# Altium PCB SensorBoard.PcbDoc
Units mil, origin at the board's own origin, x right, y up, seen from the top; angles counter-clockwise.
Board outline 1344.06 x 950.03 mil, 2 copper layers (Top1, Bottom2), stack 42.17 mil thick; 68 components, 49 nets, 268 pads, 209 vias.
Unrouted connection lines stored in the file: 36.
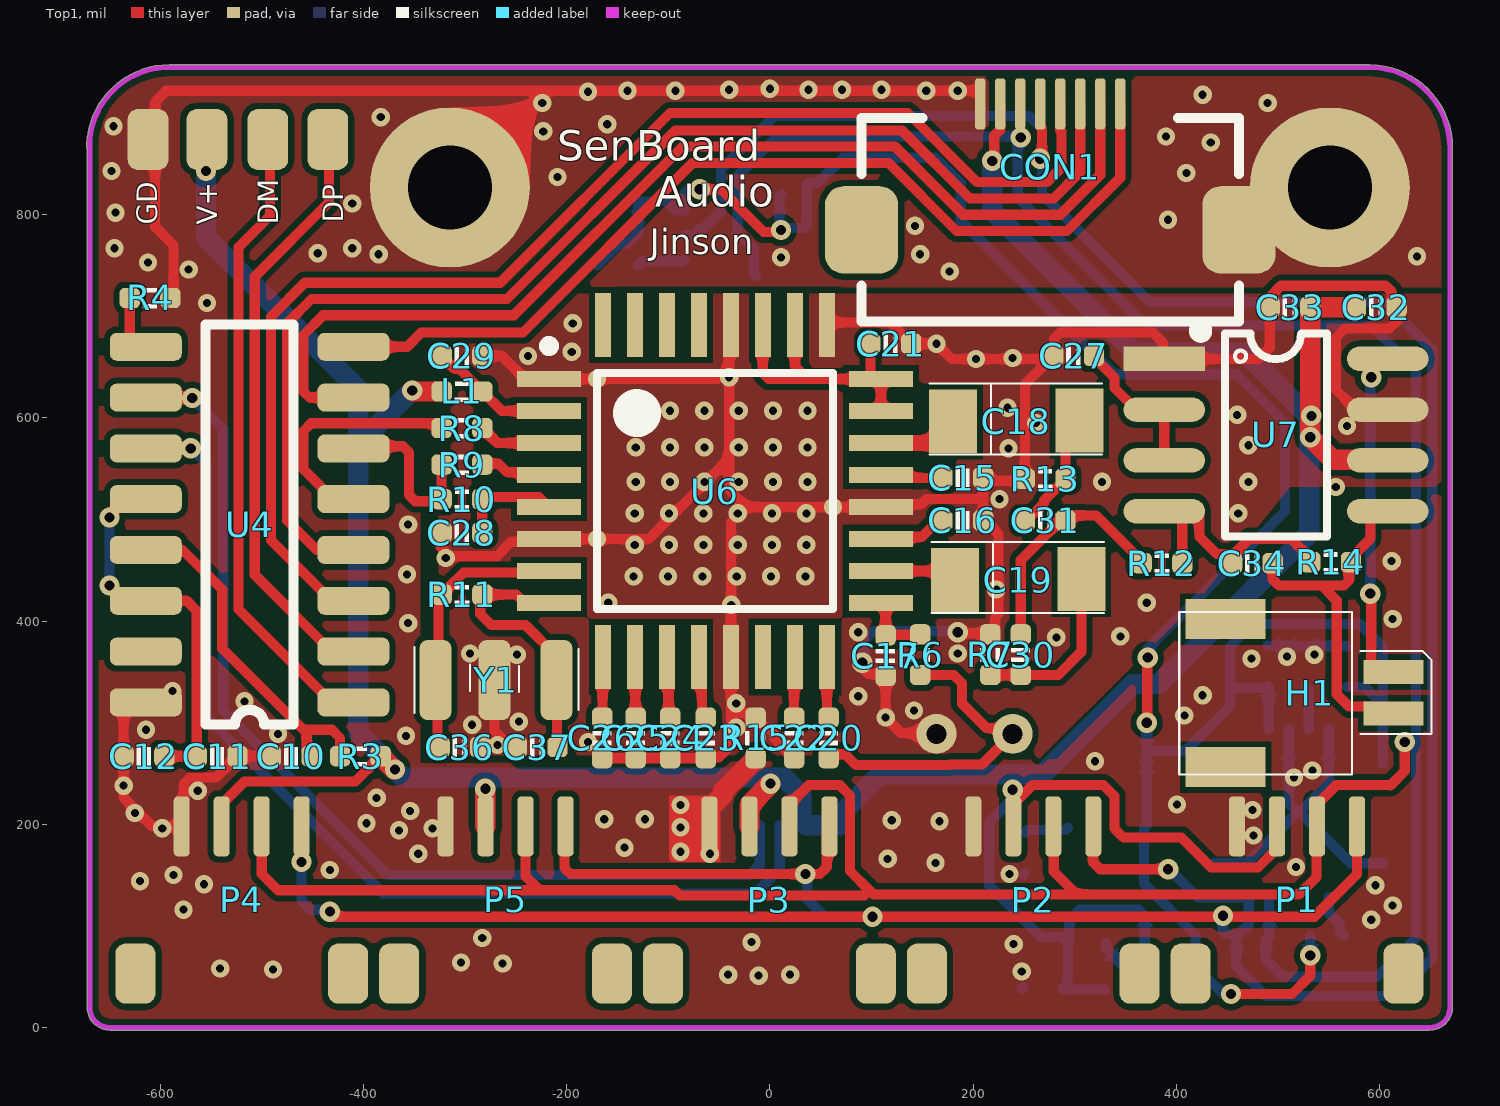
[diagram p0: Top1 view]
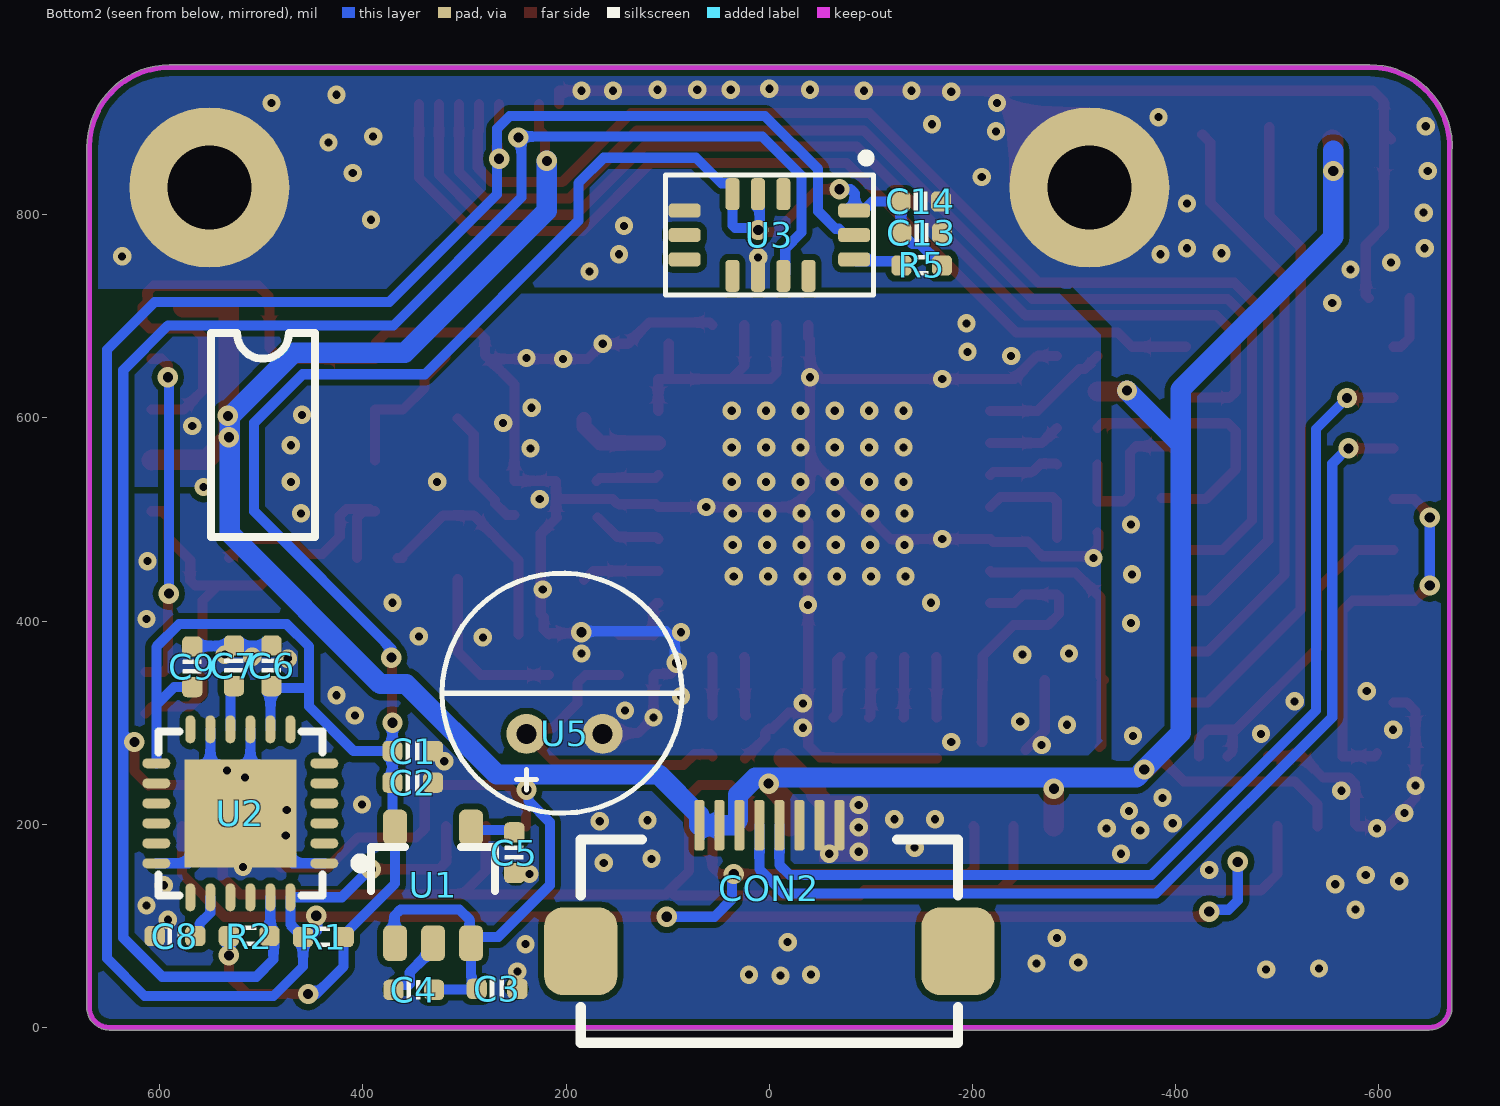
[diagram p1: Bottom2 view, seen from below]
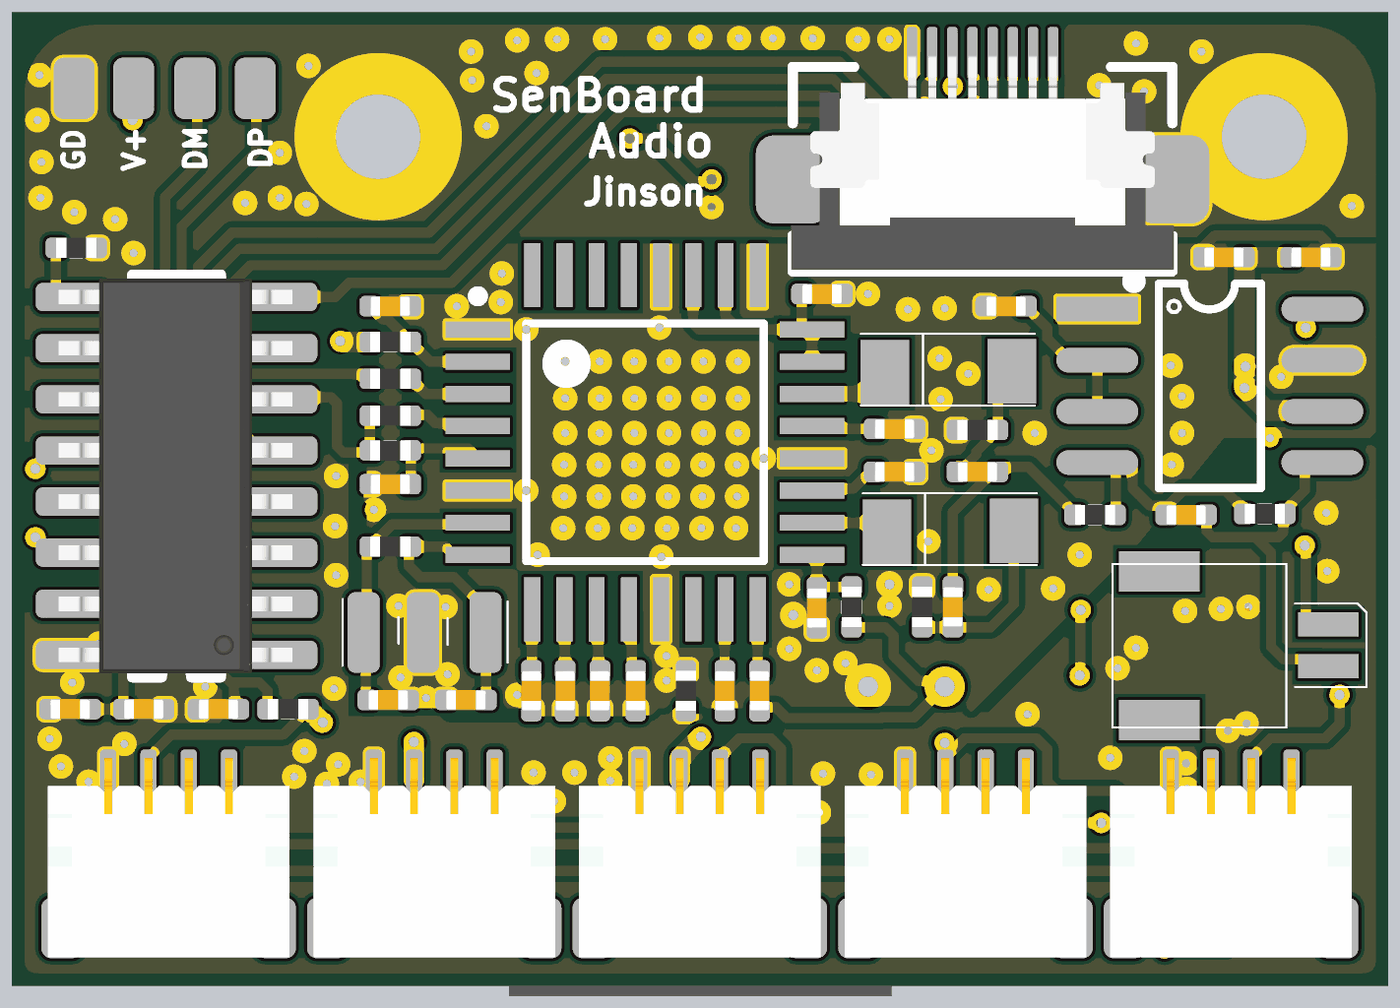
[diagram p2: 3D render of the assembled board from above, using the file's embedded part models]
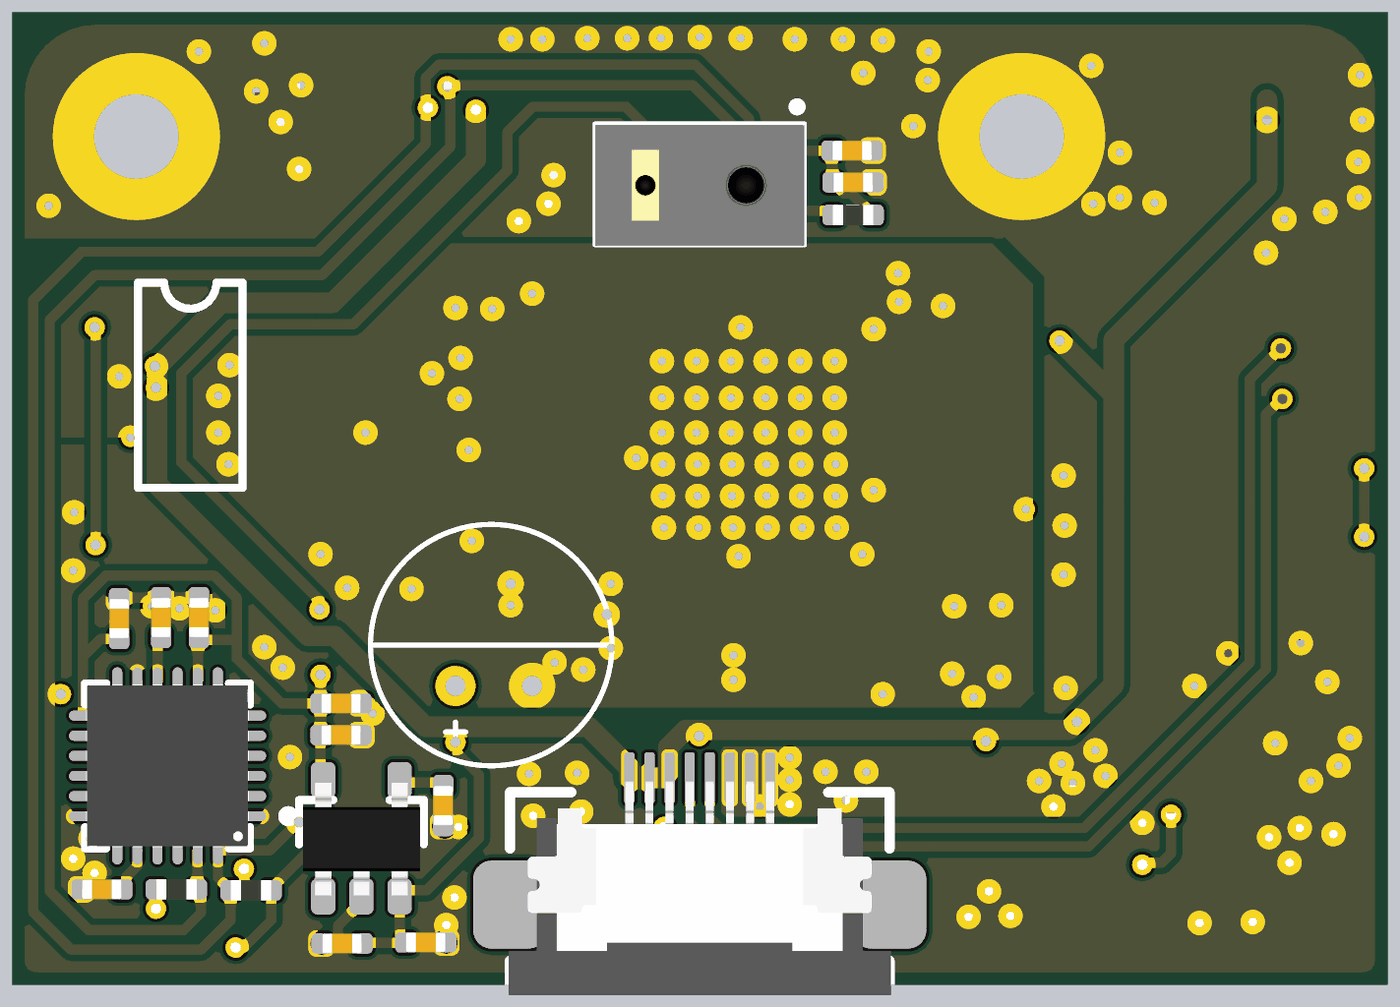
[diagram p3: 3D render of the assembled board from below, using the file's embedded part models]

## Layer stack, top to bottom
Top Solder: solder mask 0.4, Solder Resist, Dk 3.5
Top1: signal copper 1.4
Dielectric 1: prepreg 39.3701, PP-006, Dk 4.1
Bottom2: signal copper 1.4
Bottom Solder: solder mask 0.4, Solder Resist, Dk 3.5

## Board outline
-671.81,19.68 -671.81,864.83 cw(c-669.74,866.26) -672.26,866.26 cw(c-591,866.26) -671.81,874.79 -671.81,876 cw(c-669.29,876) -671.52,877.17 cw(c-591,866.26) -591,947.52 cw(c-591,945) -590.24,947.4 590.55,947.4 cw(c590.55,866.14) 671.81,866.14 671.81,19.68 ccw(c669.29,19.68) 671.81,19.69 671.81,19.68 cw(c649.61,19.68) 649.61,-2.52 cw(c649.61,0) 649.58,-2.51 -649.61,-2.51 -649.61,-2.52 ccw(c-649.61,0) -649.58,-2.51 -649.61,-2.52 cw(c-649.61,19.68)

## Design rules (kind name [scope] priority, off if disabled: settings)
Clearance Clearance_Logo [InNetClass('Logo')] p1: gap=8 ignorepadtopadclearanceinfootprint=FALSE
Clearance [All] p2: gap=6 ignorepadtopadclearanceinfootprint=FALSE
ComponentClearance [All] p1: gap=0 collisioncheckmode=3 verticalgap=0 showdistances=FALSE
DiffPairsRouting [All] p1: maxlimit=9 minlimit=9 mostfreqgap=9 toplayer_minwidth=15 toplayer_maxwidth=15 toplayer_prefwidth=15 bottomlayer_minwidth=15 bottomlayer_maxwidth=15 bottomlayer_prefwidth=15 maxuncoupledlength=500
FanoutControl Fanout_BGA [All] p1: bgadir=Out bgaviamode=Centered fanoutstyle=Auto fanoutdirection=Alternating viagrid=1 // Fanout_BGA (Default Rule)
HoleSize [All] p1: absolutevalues=TRUE maxlimit=10000 minlimit=8 maxpercent=80.000 minpercent=20.000
MinimumSolderMaskSliver [All] p1 off: minsoldermaskwidth=2
PlaneClearance [All] p1: clearance=6
PlaneConnect [All] p1: planeconnectstyle=Direct reliefexpansion=20 reliefentries=4 reliefconductorwidth=10 reliefairgap=10
PolygonConnect [All] p1: connectstyle=Direct reliefconductorwidth=10 reliefentries=4 polygonreliefangle="90 Angle" airgapwidth=10
RoutingVias [All] p1: holewidth=8 width=16 viastyle="Through Hole" minholewidth=6 minwidth=12 maxholewidth=28 maxwidth=50
SilkToSilkClearance [All] p1: silktosilkclearance=0
SilkToSolderMaskClearance [IsPad] p1: minsilkscreentomaskgap=0 clearancetoexposedcopper=TRUE
SolderMaskExpansion [All] p1: expansion=3
Width Logo [InNetClass('Logo')] p1: maxlimit=100 minlimit=0.1 preferedwidth=10
Width GND [(InNet('AGND') OR InNet('GND'))] p2: maxlimit=50 minlimit=4 preferedwidth=10
Width VCC [(InNet('VDD_SYS_3.3V') OR InNet('VDD_AV_3.3V') OR InNet('VDD_5V') OR InNet('VDD1V2-SYS') OR InNet('VDD1V1-EPHY') OR InNet('VDD-CPUX') OR InNet('VDD-CPUS') OR InNet('VDD-CPUFB') OR InNet('VCC-DRAM'))] p3: maxlimit=50 minlimit=4 preferedwidth=10
Width [All] p4: maxlimit=10000 minlimit=4 preferedwidth=4
21 further rules are at their usual default settings.

## Components (designator, comment, footprint, x,y, rotation, side; value= is the part's Value field where it differs from the comment)
C1 "0.1uF" CAP_0402 351,272 r0 bottom value=0.1u
C2 "10uF" CAP_0402 351,241 r0 bottom value=0.1u
C3 "10uF" CAP_0402 268,38 r0 bottom value=0.1u
C4 "0.1uF" CAP_0402 350,37 r180 bottom value=0.1u
C5 "10nF" CAP_0402 251,172 r90 bottom value=0.1u
C6 "10nF" CAP_0402 490,356 r90 bottom value=0.1u
C7 "0.1uF" CAP_0402 527,356 r90 bottom value=0.1u
C8 "2.2nF" CAP_0402 585,90 r180 bottom value=0.1u
C9 "0.1uF" CAP_0402 568,355 r270 bottom value=0.1u
C10 "10uF" CAP_0402 -471,267 r0 top value=0.1u
C11 "10uF" CAP_0402 -544,267 r0 top value=0.1u
C12 "0.1uF" CAP_0402 -616,267 r180 top value=0.1u
C13 "10uF" CAP_0402 -150,782 r180 bottom value=0.1u
C14 "0.1uF" CAP_0402 -149,813 r180 bottom value=0.1u
C15 "1uF" CAP_0402 190,541 r0 top value=0.1u
C16 "1uF" CAP_0402 190,499 r0 top value=0.1u
C17 "3.3uF" CAP_0402 114,366 r270 top value=0.1u
C18 "100UF" 3225_C 232,594 r0 top value=0.1u
C19 "100UF" 3225_C 234,438 r0 top value=0.1u
C20 "0.22uF" CAP_0402 58,285 r270 top value=0.1u
C21 "1uF" CAP_0402 119,673 r0 top value=0.1u
C22 "1uF" CAP_0402 24,285 r270 top value=0.1u
C23 "0.1uF" CAP_0402 -63,285 r90 top value=0.1u
C24 "3.3UF" CAP_0402 -98,285 r90 top value=0.1u
C25 "100PF" CAP_0402 -132,285 r90 top value=0.1u
C26 "100PF" CAP_0402 -165,285 r90 top value=0.1u
C27 "105" CAP_0402 299,661 r180 top value=0.1u
C28 "1uF" CAP_0402 -303,487 r0 top value=0.1u
C29 "1uF" CAP_0402 -303,661 r0 top value=0.1u
C30 "105" CAP_0402 247,367 r270 top value=0.1u
C31 "105" CAP_0402 271,499 r180 top value=0.1u
C32 "106" CAP_0402 597,709 r0 top value=0.1u
C33 "104" CAP_0402 512,709 r180 top value=0.1u
C34 "100P" CAP_0402 475,457 r180 top value=0.1u
C36 "12pf" CAP_0402 -305,276 r0 top value=0.1u
C37 "12pf" CAP_0402 -229,276 r180 top value=0.1u
CON1 "FFC_0.5_8" FFC_0.5_8 276,820 r0 top
CON2 "FFC_0.5_8" FFC_0.5_8 0,110 r180 bottom locked
H1 "SPEAKER" header2p_1.0 493,329 r270 top
L1 "1uH" RES_0402 -303,626 r180 top value=22R
P1 "SH1.0-4P" SH1.0-4P 518.98,198 r0 top locked
P2 "SH1.0-4P" SH1.0-4P 259.29,198 r0 top locked
P3 "SH1.0-4P" SH1.0-4P -0.39,198 r0 top locked
P4 "SH1.0-4P" SH1.0-4P -519.76,198 r0 top locked
P5 "SH1.0-4P" SH1.0-4P -260.08,198 r0 top locked
R1 "10K" RES_0402 439,89 r180 bottom value=22R
R2 "10K" RES_0402 512,90 r0 bottom value=22R
R3 "4.7R" RES_0402 -403,267 r180 top value=22R
R4 "100K" RES_0402 -610,718 r180 top value=22R
R5 "10K" RES_0402 -150,750 r180 bottom value=22R
R6 "1K" RES_0402 148,367 r270 top value=22R
R7 "1K" RES_0402 217,367 r270 top value=22R
R8 "22R" RES_0402 -303,590 r180 top
R9 "22R" RES_0402 -303,554 r180 top
R10 "1.5K" RES_0402 -303,520 r180 top value=22R
R11 "1M" RES_0402 -303,426 r0 top value=22R
R12 "50K" RES_0402 386,457 r0 top value=22R
R13 "1K" RES_0402 271,540 r0 top value=22R
R14 "50K" RES_0402 552,458 r0 top value=22R
R15 "0R" RES_0402 -14,285 r90 top value=22R
U1 "LP2992 3V3" SOT23-5 331,142 r90 bottom
U2 "MPU6050" QFN-24 520.68,210.79 r0 bottom
U3 "PAJ7620U2" PAJ7620U2 0,780 r270 bottom locked
U4 "HS8836A" SO-16N -517,490 r180 top
U5 "MIC" MIC6*2.2 204,329 r90 bottom
U6 "PCM2912A" PCM2912 -54,528 r0 top
U7 "SC8002B" SOP-8 498,583 r0 top
Y1 "6MHz" "cystal-3P -4520" -270,341 r180 top

## Footprints (in the part's own frame and the unit in brackets; to place one, negate y for a bottom-side part, rotate by r counter-clockwise, add the part's x,y. Pads: shape width x height; smd on the part's side, far side on the other; paste and mask are expansions set on the pad)
3225_C [mm]
  rect 1.2x1.6 smd: 1(-1.309,0.062) 2(1.845,0.085)
  silkscreen extent -1.91,-0.76 2.41,1.02
CAP_0402 [mil]
  rrect50% 20x20 smd: 1(-20,0) 2(20,0)
  silkscreen extent -6,-9 6,9, body extent -20,-10 20,10, height 20
"cystal-3P -4520" [mm]
  rrect50% 0.8x2 smd: 1(-1.525,-0.025) 2(0.026,-0.024) 3(1.5,-0.025)
  silkscreen extent -2.07,-0.85 2.02,0.8
FFC_0.5_8 [mil]
  rrect50% 72x86 smd: 0(-185.63,-35) 0(185.63,-35)
  rrect50% 10x50 smd: 1(-68.9,89) 2(-49.21,89) 3(-29.53,89) 4(-9.84,89) 5(9.84,89) 6(29.53,89) 7(49.21,89) 8(68.9,89)
  silkscreen extent -186,-125 186,75, body extent -187,-124 187,87, height 82
header2p_1.0 [mm]
  rect 1x2 smd: 0(-1.85,-1.125) 0(1.85,-1.125)
  rect 0.6x1.5 smd: 1(-0.532,3.075) 2(0.509,3.075)
  silkscreen extent -2.03,-2.29 2.03,4.03
MIC6*2.2 [mm]
  round 1 hole 0.5: 1(-1.016,0.889) 2(-1.016,-1.016)
  silkscreen extent -3,-3 3,3
PAJ7620U2 [mm]
  rrect50% 0.35x0.8 smd: 1(-0.61,2.12) 2(0,2.12) 3(0.61,2.12) 8(0.61,-2.12) 9(0,-2.12) 10(-0.61,-2.12)
  rrect50% 0.8x0.35 smd: 4(1.02,0.983) 5(1.02,0.348) 6(1.02,-0.287) 7(1.02,-0.922) 11(-1.02,-0.922) 12(-1.02,-0.287) 13(-1.02,0.348)
  silkscreen extent -1.95,-2.6 1.5,2.6, body extent -1.48,-2.6 1.52,2.6, height 1.9
PCM2912 [mm]
  rect 1.6x0.4 smd: 1(-4.15,2.8) 2(-4.15,2) 3(-4.15,1.2) 4(-4.15,0.4) 5(-4.15,-0.4) 6(-4.15,-1.2) 7(-4.15,-2) 8(-4.15,-2.8) 17(4.15,-2.8) 18(4.15,-2) 19(4.15,-1.2) 20(4.15,-0.4) 21(4.15,0.4) 22(4.15,1.2) 23(4.15,2) 24(4.15,2.8)
  rect 0.4x1.6 smd: 9(-2.8,-4.15) 10(-2,-4.15) 11(-1.2,-4.15) 12(-0.4,-4.15) 13(0.4,-4.15) 14(1.2,-4.15) 15(2,-4.15) 16(2.8,-4.15) 25(2.8,4.15) 26(2,4.15) 27(1.2,4.15) 28(0.4,4.15) 29(-0.4,4.15) 30(-1.2,4.15) 31(-2,4.15) 32(-2.8,4.15)
  silkscreen extent -4.27,-2.95 2.95,3.75, body extent -3.5,-3.5 3.5,3.5, height 1.2
QFN-24 [mm] "QFN, 24-Leads, Body 4.1x4.1mm (max), Pitch 0.50mm, IPC Low Density"
  oval 0.7x0.25 smd: 1(-2.1,1.25) 2(-2.1,0.75) 3(-2.1,0.25) 4(-2.1,-0.25) 5(-2.1,-0.75) 6(-2.1,-1.25) 13(2.1,-1.25) 14(2.1,-0.75) 15(2.1,-0.25) 16(2.1,0.25) 17(2.1,0.75) 18(2.1,1.25)
  oval 0.25x0.7 smd: 7(-1.25,-2.1) 8(-0.75,-2.1) 9(-0.25,-2.1) 10(0.25,-2.1) 11(0.75,-2.1) 12(1.25,-2.1) 19(1.25,2.1) 20(0.75,2.1) 21(0.25,2.1) 22(-0.25,2.1) 23(-0.75,2.1) 24(-1.25,2.1)
  rect 2.8x2.7 smd: ""(0,0)
  silkscreen extent -3.12,-2.05 2.05,2.05, body extent -2.02,-2.02 2.02,2.02, height 0.95
RES_0402 [mil]
  rrect50% 20x20 smd: 1(-20,0) 2(20,0)
  silkscreen extent -7,-10 7,10, body extent -20,-10 20,10, height 14
SH1.0-4P [mm]
  rrect50% 0.4x1.5 smd: 1(-1.5,0) 2(-0.5,0) 3(0.5,0) 4(1.5,0)
  rrect50% 1x1.5 smd: SH1(-2.659,-3.683) SH2(2.659,-3.683)
  body extent -3,-4.42 3,0.54, height 3.14
SO-16N [mm]
  rrect50% 1.8x0.7 smd: 1(-2.723,4.318) 2(-2.723,3.048) 3(-2.723,1.778) 4(-2.723,0.508) 5(-2.723,-0.762) 6(-2.723,-2.032) 7(-2.723,-3.302) 8(-2.723,-4.572) 9(2.469,-4.572) 10(2.469,-3.302) 11(2.469,-2.032) 12(2.469,-0.762) 13(2.469,0.508) 14(2.469,1.778) 15(2.469,3.048) 16(2.469,4.318)
  silkscreen extent -1.23,-5.13 0.97,4.87, body extent -3,-5.03 2.8,4.77, height 1.75
SOP-8 [mil]
  rect 80x24 smd: 1(-109.81,75.17)
  oval 80x24 smd: 2(-109.81,25.17) 3(-109.81,-24.83) 4(-109.81,-74.83) 5(110.19,-74.83) 6(110.19,-24.83) 7(110.19,25.17) 8(110.19,75.17)
  silkscreen extent -80,-100 50,108
SOT23-5 [mm] "SOT23, 3-Leads, Body 3.1x3.0mm (max), Pitch 0.95mm, IPC Medium Density"
  rrect50% 0.889x0.6 smd: 1(-1.5,0.95) 2(-1.5,0) 3(-1.5,-0.95) 4(1.396,-0.95) 5(1.396,0.95)
  silkscreen extent -0.2,-1.55 0.9,1.55, body extent -1.48,-1.45 1.32,1.45, height 1.2

## Part data
C1 C2 C3 C4 C5 C6 C7 C8 C9 C10 C11 C12 C13 C14 C15 C16 C17 C18 C19 C20 C21 C22 C23 C24 C25 C26 C27 C28 C29 C30 C31 C32 C33 C34 C36 C37: library part 电容-0402, "Capacitor"
CON1 CON2: "FFC"
H1: library part HEADER-2P
L1 R1 R2 R3 R4 R5 R6 R7 R8 R9 R10 R11 R12 R13 R14 R15: library part 电阻-0402, "Resistor"
U1: library part LP2992, "LDO"
U2: "六轴传感器"
U3: "module sensorPAJ7620U2 : 54/TRAY, 5400/BOX, 32400/CARTON", Package=None, Availability="Not in stock", Check_prices=https://www.snapeda.com/parts/PAJ7620U2/PixArt/view-part/?ref=eda, MF=Pixart, MP=PAJ7620U2, Price=None, SnapEDA_Link=https://www.snapeda.com/parts/PAJ7620U2/PixArt/view-part/?ref=snap
U4: "USB2.0 HUB"
Y1: library part 晶振-3Pin, "村田贴片"

## Free pads (board coordinates)
  rrect50% 40x60 smd: ""(-612,874) ""(-554,874) ""(-494,874) ""(-435,874)
  round 157.48 hole 82.68: ""(-314.96,826.77) ""(551.18,826.77)

## Via types
v1: diameter 18, hole 8, Top1 to Bottom2, 177 vias
v2: diameter 20, hole 10, Top1 to Bottom2, 32 vias

## Nets (pads, with @x,y where several pads share a name; then routed paths per layer and width w, separated by ;. In a path a pad name is that pad's centre, name@x,y a point inside that pad or via, vN(x,y) a via of type N, cw(c..) or ccw(c..) an arc to the next point about the centre after c; other vN are vias at no path point)
GND: C1.1 C2.1 C3.1 C4.1 C5.1 C6.2 C7.2 C8.1 C9.1 C10.1 C11.2 C12.2 C13.2 C14.2 CON1.0@461.63,785 CON1.1 CON2.6 CON2.7 CON2.8 P1.1 P2.1 P3.1 P4.1 P5.1 pad.@551.18,826.77 pad.@-314.96,826.77 pad.@-612,874 R4.1 R15.1 U1.2 U2. U2.1 U2.9 U2.11 U2.18 U3.6 U3.10 U4.16 | length 2119.5
  Top1 w10: U4.16 -627.36,320 -636,311.36 C12.2 -636,226 -608,198 P4.1 -576.47,200.35 -576.47,240.14 -570.61,246 -545,246 C11.2 C10.1 ; pad.@-612,874 pad.@-605,881 ; R4.1 -587,721 -587,770 -605,788 pad.@-605,881 ; pad.@-314.96,826.77 -219.73,922 ; CON1.1 207.1,922 -219.73,922 ; pad.@-605,881 -605,911 -594,922 -219.73,922
  Top1 w20: P3.1 -59.45,215.4 -46,228.85 -46,233 R15.1
  Bottom2 w10: C3.1 C3.1@249.5,39.5 ; C5.1@249.5,150.5 C5.1 ; U1.2 331,77.26 354,54.26 354,42.86 354.86,42 365,42 C4.1 ; U2.1 469.5,161.57 518.71,210.79 U2. ; C6.2 490.5,375.5 567.5,375.5 C9.1 ; U2.9 510.83,220.63 U2. ; U2.11 550.2,240.31 U2. ; U2.18 571.86,161.57 522.65,210.79 U2.
  other v1: -11,51 -41,52 20,52 248,55 -489,57 -541,58 -263,63 -304,64 240,82 -18,84 -283,88 592,106 -577,116 613,120 596,140 -557,141 -620,144 -587,150 236,151 -433,155 518,158 163,162 116,166 -346,171 -59,171 -88,173 -143,177 476,189 -365,194 -598,196 -332,196 -88,197 -397,201 167,203 120,204 -163,205 -123,205 -625,211 -354,213 475,214 -88,219 400.87,219.42 -387,226 -563,233 -636,238 516,246 534,253 320,262 -358,287 -484,289 -614,293 408,307 -517,321 426,327 -588,331 474,363 509,365 536,367 -356,398 613,402 -357,446 612,459 -356,495 -554,713 177,744 -572,746 -612,753 11,758 637,759 -385,761 148,761 -445,762 -645,767 -411,767 143,789 392,795 -644,802 -411,811 -209,837 410,841 -648,843 434,871 390,877 -223,882 -646,887 -160,889 -383,896 -224,910 490,910 426,918 -179,921 -140,922 -93,922 154,922 185,922 -40,923 38,923 71,923 110,923 0,924
GND_AUDIO_1: C15.2 C16.2 C17.2 C21.2 C22.2 C23.1 C24.1 C25.1 C26.1 C27.2 C28.1 C29.2 C32.2 C33.2 C36.2 C37.2 R7.1 R13.1 R15.2 U5.2 U6.1 U6.6 U6.13 U6.20 U6.25 U6.28 U7.1 U7.7 Y1.2 | length 3054.4
  Top1 w10: C28.1 -324,486 -324,473 -314.82,463.82 -268.56,463.82 -262,470.37 -262,471 -255.12,477.88 -220.26,477.88 U6.6 v1(-170.14,480.76) -119.24,480.76 -40,560 ; C29.2 -263.77,661 -241.01,638.24 U6.1 v1(-170.14,638.24) -51.76,638.24 -40,650 ; Y1.2 -271,292 C37.2@-252,273 ; C26.1 C25.1 C24.1 C23.1 -62,266 -50,266 -38.25,277.75 v1@-38.25,314 ; U6.28 -38.25,679 -40,677.25 -40,650 ; C22.2 4,285 4,290 0,294 -3,294 R15.2 -19,310 -34.25,310 v1@-38.25,314 ; U6.25 58.85,694 118,694 C21.2 v1(164,673) 179,658 v1(203,658) C27.2@276,658 ; v2(91,359) 91,353.86 96.86,348 112,348 C17.2 v1(114,305) 129.31,289.69 163.31,289.69 U5.2 ; v2(185,389) 186,388 216,388 R7.1 222,392 222,404 225,407 225,486 C16.2@209,502 ; C16.2@210,502 210,525 ; U7.7 576.41,608.17 557.19,627.38 557.19,679.19 566,688 610,688 617,695 C32.2 612,714 612,724.14 606.14,730 503,730 493,720 493,710 C33.2 492,669 481,658 388.37,658 U7.1 387,659.37 387,674 377,684 285.86,684 280,678.14 280,662 C27.2 C27.2@276,658 ; -40,560 v1(-40,640) -40,650 ; -40,560 -40,529 -23.25,512.25 ; v1@-38.25,314 U6.13 -38.25,497.25 -23.25,512.25 ; -23.25,512.25 v1(62.14,512.25) U6.20 112.26,515.13 149.13,515.13 154,520 205,520 210,525 ; 210,525 210,538 251,538 R13.1 251,633 C27.2@276,658
  Bottom2 w10: v2(91,359) 92.91,360.91 92.91,380.91 102,390 184,390 v2(185,389)
  other v1: -268,278 -179,281 -33,295 -293,298 -247,301 142,312 -33,319 87,326 -249,367 -295,368 185,368 282,384 345,385 87,389 -38,416 -159,418 371,418 223,431 -134,444 -100.2,444 -66.4,444 -32.6,444 1.2,444 35,444 -319,462 -133,475 -99.2,475 -65.4,475 -31.6,475 2.2,475 36,475 -133,506 -99.2,506 -65.4,506 -31.6,506 2.2,506 36,506 461,506 226,520 557,532 -132,537 -98.2,537 -64.4,537 -30.6,537 3.2,537 37,537 327,537 471,537 235,570 -132,571 -98.2,571 -64.4,571 -30.6,571 3.2,571 37,571 471,573 568,592 262,595 460,603 -132,607 -98.2,607 -64.4,607 -30.6,607 3.2,607 37,607 234,610 239,659 -238,661 -195,665 -194,693
I2C_SCL_1: CON1.3 P1.3 P2.3 P3.3 P4.3 P5.3 R2.1 U2.23 U3.5 | length 3375.1
  Top1 w10: P4.3 -500.08,151.08 -484,135 -226.5,135 ; P5.3 -240.39,148.89 -226.5,135 ; P3.3 19.29,219.65 38.17,238.53 68.79,238.53 79,228.31 79,154 98,135 ; P2.3 279.53,197.45 279.53,153.47 298.22,134.78 302,131 ; v2(625,281) 625,252.47 611,238.47 611,238.53 557.54,238.53 538.66,219.65 P1.3 538,197.34 538,148 521,131 302,131 ; -226.5,135 -93.9,135 -88.9,130 93,130 98,135 ; 98,135 102,131 302,131
  Bottom2 w10: U3.5 -15.59,741.73 -15.59,766.59 -31.59,782.59 -31.59,838.44 6.88,876.91 v2@244.09,876.91 ; v2(247,876) 245,876 v2@244.09,876.91 ; U2.23 491.23,128.03 491.23,90.77 R2.1 488,86 488,67 505,50 597.63,50 636,88.37 636,289 ; v2(625,281) 628,281 636,289 ; v2@244.09,876.91 244.09,816.91 370,691 592,691 636,647 636,289
I2C_SDA_1: CON1.4 P1.4 P2.4 P3.4 P4.4 P5.4 R1.1 U2.24 U3.2 | length 3714.9
  Top1 w10: v2(-433,114) -428,109 v2(101,109) 536,109 578.03,151.03 P1.4 ; P5.4 -202,197.02 -202,156.86 -196.14,151 v2(35,151) 49.14,151 56,157.86 56,195.34 P3.4 ; v2(266,855) 268,857 268,884.7 266,886.7 266,908.84 CON1.4 ; P2.4 318,197.65 318,163 325.22,155.78 v2(392.02,155.78)
  Bottom2 w10: v2(-461,163) -461,125 -451.91,115.91 -434.91,115.91 v2(-433,114) ; U3.2 -74.61,780 -68.48,786.13 -65.18,786.13 -48,803.3 -48,844.66 4.34,897 255.7,897 268,884.7 268,820 374,714 605,714 652,667 652,68 615,31 488,31 459,60 R1.1 ; v2(35,151) 36.91,149.09 36.91,126.09 54,109 v2(101,109) ; v2(392.02,155.78) 393.22,155.78 420.89,128.11 U2.24 471.39,128.03 471.39,101.39 R1.1 ; v2(446,110) 445.5,109.5 445.5,95 448.5,92 456,92 R1.1
NetC5_2: C5.2 U1.4 | length 44.6
  Bottom2 w10: C5.2 253.47,194.47 291.13,194.47 U1.4
NetC7_1: C7.1 U2.10 | length 44
  Bottom2 w10: C7.1 530.44,332.56 530.44,293.54 U2.10
NetC8_2: C8.2 U2.20 | length 44.2
  Bottom2 w10: U2.20 550.28,128.03 550.28,112.72 561,102 561,94 C8.2
NetC10_2: C10.2 R3.2 U4.13 | length 349.1
  Top1 w10: U4.13 -578,470 -539,431 -539,373 -459,293 ; C10.2 -456,272 -456,290 -459,293 ; R3.2 -423,285 -431,293 -459,293
NetC11_1: C11.1 C12.1 U4.12 U4.14 | length 409.2
  Top1 w10: v2(-650,435) -649.84,435 -634.84,420 U4.14 -574,420 -564,410 C11.1 C12.1@-595,267 ; v2(-650,502) -648.09,503.91 -648.09,506.75 -634.84,520 U4.12 ; U4.14@-633.86,421 U4.14@-612.2,421 ; C12.1@-598,270 C12.1@-595,267 ; C12.1 C12.1@-595,267
  Bottom2 w10: v2(-650,435) v2(-650,502)
NetC15_1: C15.1 U6.21 | length 63
  Top1 w10: U6.21 112.26,540.87 167.13,540.87 C15.1@170,538
NetC16_1: C16.1 U6.19 | length 68.4
  Top1 w10: U6.19 111.49,482.86 149.86,482.86 C16.1@169,502
NetC17_1: C17.1 R6.1 U6.17 | length 69.1
  Top1 w10: U6.17 111.13,417.76 114,414.89 C17.1 114.5,386.5 147.5,386.5 R6.1
NetC18_1: C18.1 U6.22 | length 86.8
  Top1 w15: U6.22 166.35,575.24 182.47,591.37 C18.1@182.47,598.45
NetC19_1: C19.1 U6.18 | length 76.7
  Top1 w10: U6.18 173.66,449.26 C19.1
NetC20_1: C20.1 U6.16 | length 57.7
  Top1 w10: C20.1@56,307 56.12,307.12 56.12,364.5 U6.16
NetC20_2: C20.2 R6.2 U5.1 | length 327.7
  Top1 w10: C20.2@56,267 58,269 74,269 84.69,258.31 176.71,258.31 177.4,259 209,259 U5.1 233.38,294.62 213.38,294.62 189,319 189,339 181,347 R6.2
NetC21_1: C21.1 U6.23 U6.24 U6.26 U6.27 | length 292.1
  Top1 w10: U6.27 -7,691.14 -7,644.09 -1.14,638.24 37.5,638.24 ; U6.26 24.74,651 37.5,638.24 ; C21.1 99,641.11 U6.24@101.87,638.24 ; U6.23 U6.24 U6.24@101.87,638.24 ; 37.5,638.24 U6.24@101.87,638.24
NetC22_1: C22.1 U6.15 | length 58.3
  Top1 w10: C22.1@23,307 23.87,307.87 23.87,363.74 U6.15
NetC23_2: C23.2 U6.12 | length 62.4
  Top1 w10: U6.12 -66.87,361.74 -66.87,308.87 C23.2
NetC24_2: C24.2 U6.11 | length 61
  Top1 w10: U6.11 -99.62,362.99 -99.62,306.62 C24.2
NetC25_2: C25.2 U6.10 | length 59.9
  Top1 w10: U6.10 -132.37,364.24 -132.37,305.37 C25.2
NetC26_2: C26.2 U6.9 | length 59.9
  Top1 w10: C26.2 -164.62,305.38 -164.62,364.23 U6.9
NetC27_1: C27.1 U7.2 U7.3 | length 147.7
  Top1 w10: C27.1 319,659.81 339.27,639.54 339.27,629.44 360.54,608.17 U7.2 U7.3
NetC28_2: C28.2 R10.1 U6.5 | length 107.3
  Top1 w10: C28.2@-283,482 C28.2 -283,518 -279,522 -227.13,522 U6.5
NetC29_1: C29.1 L1.1 U6.2 | length 128.1
  Top1 w10: C29.1 -310,648 -305,648 L1.1 -263.86,606.86 -217.5,606.86 U6.2
NetC30_1: C30.1 C31.1 R12.1 | length 228.8
  Top1 w10: C30.1 247,460 291,504 321,504 361,464 361,462 R12.1@366,462
NetC34_1: C34.1 H1.2 R14.2 U7.5 | length 362.9
  Top1 w10: C34.1 495,441 501,435 543,435 ; U7.5 597.61,508.17 591.14,501.71 591.14,481.14 570,460 570,440 565,435 543,435 ; H1.2 607.25,315.77 570.23,315.77 558,328 558,420 543,435
NetC34_2: C34.2 R12.2 R14.1 U7.4 | length 243.4
  Top1 w10: U7.4 393.19,508.17 399.53,508.17 406,501.71 R12.2@406,462 ; U7.4@393.19,510.17 399.53,510.17 416.36,510.17 422.83,503.71 422.83,483.17 440,466 457,466 472,481 513,481 R14.1@532,462
NetC36_1: C36.1 R11.1 U6.7 Y1.3 | length 269.4
  Top1 w10: C36.1 -327.03,278.03 -327.03,339.96 Y1.3 -326.03,345.01 -326.03,422.97 -301.18,447.82 -218.83,447.82 U6.7
NetC37_1: C37.1 R11.2 U6.8 Y1.1 | length 266.3
  Top1 w10: U6.8 -241.01,417.76 -249.24,426 R11.2 -285,424 -285,407 -274,396 -240.35,396 -209.96,365.61 Y1.1 -209.48,341.5 -209.48,281 C37.1@-209,281
NetH1_1: H1.1 U7.8 | length 344.8
  Top1 w10: v2(591,427) 588.29,427 592,423.29 592,354.31 596.35,349.96 H1.1 ; v2(592,640) 592,651.71 598.47,658.17 U7.8
  Bottom2 w10: v2(591,427) 591,639 v2(592,640)
NetR4_2: R4.2 U4.9 | length 58.7
  Top1 w10: R4.2 -630,678.64 -621.36,670 U4.9
NetR5_1: R5.1 U3.3 | length 49
  Bottom2 w10: R5.1 -125.91,754.09 -85.35,754.09 U3.3
NetR8_1: R8.1 U6.3 | length 71.7
  Top1 w10: R8.1 -268.24,575.24 U6.3
NetR9_1: R9.1 U6.4 | length 70.7
  Top1 w10: R9.1 -282,555 -267,555 -258.62,546.62 -220.26,546.62 U6.4
OUT_L_1: C19.2 C30.2 R7.2 | length 170.7
  Top1 w10: R7.2 C30.2 284,347 306.65,369.65 C19.2
OUT_R_1: C18.2 C31.2 R13.2 | length 122.3
  Top1 w10: C31.2@251,504.5 258.5,504.5 270,516 270,519 R13.2 291,583.71 C18.2 C18.2@306.65,599.36
USB_DM_AUD_1: R8.2 U4.5 | length 261.8
  Top1 w10: U4.5 -429.45,520 -459,549.55 -459,587.14 -451.36,594.78 -327.78,594.78 R8.2 ; U4.5@-407.8,521 U4.5@-386.14,521
USB_DM_CAM_1: pad.@-494,874 U4.1 | length 638.4
  Top1 w10: pad.@-492,886 -492,799 -523,768 -523,411.55 -431.45,320 U4.1
USB_DM_CP_1: CON1.5 U4.3 | length 1284.2
  Top1 w10: U4.3 -431.45,420 -491,479.55 -491,699.66 -457.66,733 -265.25,733 -98.25,900 136,900 204,832 272.7,832 287,846.3 287,881.7 285.84,882.86 CON1.5
USB_DM_HUB_1: CON2.5 U4.10 | length 1004.4
  Top1 w10: U4.10 -613.95,619.75 -568.75,619.75 v2(-568.5,619.5)
  Bottom2 w10: v2(-568.5,619.5) -538,589 -538,312 -376,150 -20,150 -9.84,160.16 CON2.5
USB_DM_ST_1: CON1.7 U4.7 | length 1082.1
  Top1 w10: U4.7 -453.14,620 -459,625.86 -459,681.53 -439.53,701 -252,701 -86,867 123.37,867 190.37,800 285.95,800 325.21,839.26 CON1.7
USB_DP_AUD_1: R9.2 R10.2 U4.6 | length 171.4
  Top1 w10: U4.6@-409.8,573 U4.6@-407.8,571 ; U4.6@-407.8,570 -396.97,570 -394.97,572 -361,572 -355,566 -355,524 -349,518 -323,518 R9.2
USB_DP_CAM_1: pad.@-435,874 U4.2 | length 595.5
  Top1 w10: pad.@-426,879 -434,871 -434,812 -507,739 -507,445.55 -431.45,370 U4.2
USB_DP_CP_1: CON1.6 U4.4 | length 1230.7
  Top1 w10: U4.4@-415,470 -446,470 -475,499 -475,693.03 -451.03,717 -258.63,717 -92.63,883 130,883 197,816 279.33,816 305.53,842.2 CON1.6
USB_DP_HUB_1: CON2.4 U4.11 | length 1004.7
  Top1 w10: U4.11 v2(-570,570)
  Bottom2 w10: v2(-570,570) -569,570 -554,555 -554,305.37 -380.63,132 -14,132 9.84,155.84 CON2.4
USB_DP_ST_1: CON1.8 U4.8 | length 951.8
  Top1 w10: U4.8 -357,670 -343,684 -243,684 -76,851 116.75,851 183.75,784 292.58,784 344.9,836.32 CON1.8
VBUS_IN: C3.2 C4.2 C32.1 C33.1 CON1.2 CON2.1 CON2.2 CON2.3 L1.2 P1.2 P2.2 P3.2 P4.2 P5.2 pad.@-554,874 R3.1 U1.1 U1.3 U7.6 | length 3878.7
  Top1 w10: P4.2 -539.45,219.65 -516.84,242.26 -407.74,242.26 R3.1 ; v2(219,853) 220.91,854.91 220.91,877.62 226.79,883.49 CON1.2 ; P2.2 239.61,219.65 257.95,238 258.53,238.53 328.47,238.53 339.25,227.75 339.25,195.75 348,187 405,187 434.53,157.47 480.42,157.47 499.29,176.35 P1.2
  Top1 w20: v2(-555,843) -555,873 pad.@-554,874 ; R3.1 -370,254 v2(-369,254) ; v2(-352,627) -351,626 L1.2 ; v2(-280,235) -280,198.24 P5.2 ; P3.2 -20,198.08 -20,219.3 v2(0.7,240) ; C32.1 C33.1 v2(532,581) 554.06,558.94 607.43,558.94 U7.6
  Bottom2 w10: 239,249 v2(239,234) 237.09,232.09 237.09,223.09 216,202 216,140 266.79,89.21 287.33,89.21 U1.3 ; C4.2 329.5,37.5 288.5,37.5 C3.2 293,43 293,49.85 293.6,50.44 U1.3 ; U1.1 369,83.54 369,110.14 363.14,116 305,116 295,106 295,84.35 U1.3
  Bottom2 w20: -555,863 v2(-555,843) -555,778 -405,628 -405,574 ; v2(-352,627) -405,574 ; v2(219,853) 219,804 359,664 468,664 531,601 531,486.23 382.77,338 357.3,338 268.3,249 239,249 108.9,249 68.9,209 CON2.1 CON2.2 36,199 30.84,204.16 30.84,229.16 14.01,246 -361,246 v2(-369,254) -405,290 -405,574
  other v2: 533,602
VCC_3V3: C1.2 C2.2 C6.1 C9.2 C13.1 C14.1 R1.2 R2.2 R5.2 U1.5 U2.8 U2.13 U3.1 U3.11 U3.12 | length 2321.3
  Top1 w10: v2(-69,825) -48,825 -6,783 9,783 v2(11,785) ; v2(371,300) 371.5,300.5 371.5,363.5 v2(372,364) ; v2(454,33) 514,33 532,51 v2(532,71)
  Bottom2 w10: R5.2 -159,761 -158.37,761 -148.37,771 -141,771 C13.1 -129.5,782.5 -129.5,812.5 C14.1 -101.31,813 -92.32,804.02 U3.1 -84,804.55 -84,821 -80,825 v2(-69,825) ; 9.41,795.27 9.41,818.27 U3.12 ; v2(11,785) 12.91,786.91 33.8,786.91 36.3,789.41 U3.11 36.3,829.02 38.19,830.91 47.05,830.91 72.14,856 163.14,856 188,831.14 188,794 339,643 459.3,643 507.15,595.15 507.15,508.15 372,373 v2(372,364) ; v2(371,300) C1.2 ; v2(454,33) 446,33 419,60 R1.2 420,90 368.4,141.6 U1.5 371,199.54 C2.2 C1.2 ; U2.8 491.07,293.54 491.07,334.93 C6.1 488,334 453,334 ; v2(532,71) R2.2 ; C9.2 586,335 603.35,317.65 ; U2.13 603.35,317.65 ; C1.2 409,272 453,316 453,334 ; 453,334 453,375 475,397 581,397 603.35,374.65 603.35,317.65
pads on no net: CON1.0@90.37,785 CON2.0 H1.0 P1.SH1 P1.SH2 P2.SH1 P2.SH2 P3.SH1 P3.SH2 P4.SH1 P4.SH2 P5.SH1 P5.SH2 U2.2 U2.3 U2.4 U2.5 U2.6 U2.7 U2.12 U2.14 U2.15 U2.16 U2.17 U2.19 U2.21 U2.22 U3.4 U3.7 U3.8 U3.9 U3.13 U4.15 U6.14 U6.29 U6.30 U6.31 U6.32

## Polygon pours and split planes (outlines as drawn)
GND on Top1 "Top1-GND" (solid, pour order 26): 671,945 -665,945 -669,949 -673,945 -673,-10 653,-10 672,9 665,16 665,532 550,532 282,264 -344,260 -344,689 -298,729 -296,727 673,727
GND_AUDIO_1 on Top1 "Top1-GND_AUDIO_1" (solid, pour order 24): -286,722 668,722 668,553 672,549 655,532 512,532 423,422 265,264 261,268 -314,268 -328,282 -326,284 -326,682
GND on Bottom2 "Bottom2-GND" (solid, pour order 28): 671,945 -665,945 -669,949 -673,945 -673,-10 653,-10 672,9 665,16 665,532 550,532 282,264 -337,264 -337,690 -298,729 -296,727 673,727
GND_AUDIO_1 on Bottom2 "Bottom2-GND_AUDIO_1" (solid, pour order 22): -286,722 668,722 668,553 672,549 655,532 512,532 423,422 265,264 261,268 -314,268 -328,282 -326,284 -326,682

## Keep-outs
Keep-Out Layer:
  lines w5: -669.74,866.26 cw(c-591,866.26) -591,945 ; -669.29,876 -669.29,19.69 ccw(c-649.61,19.68) -649.61,0 649.61,0 ccw(c649.61,19.68) 669.29,19.68 669.29,866.14 ccw(c590.55,866.14) 590.55,944.88 -591,944.88

## Other copper
Top1:
  region net GND: -99,228 -56,228 -47,219 -49,217 -49,163 -97,163 -99,165

## Silkscreen, mask and mechanical layers (free items; w line width, h text height)
Top Overlay:
  text "SenBoard" at -209,853 h30
  text "Audio" at -113,808 h30
  text "DP" at -420,792 h20 r90
  text "GD" at -603,790 h20 r90
  text "V+" at -544,790 h20 r90
  text "DM" at -484,790 h20 r90
  text "Jinson" at -118,761 h25